# Altium PCB Плата_V_№2.PcbDoc
Units mm, origin at the board's own origin, x right, y up, seen from the top; angles counter-clockwise.
Board outline 70 x 20 mm, 2 copper layers (Top Layer, Bottom Layer); 14 components, 24 nets, 101 pads, 8 vias.
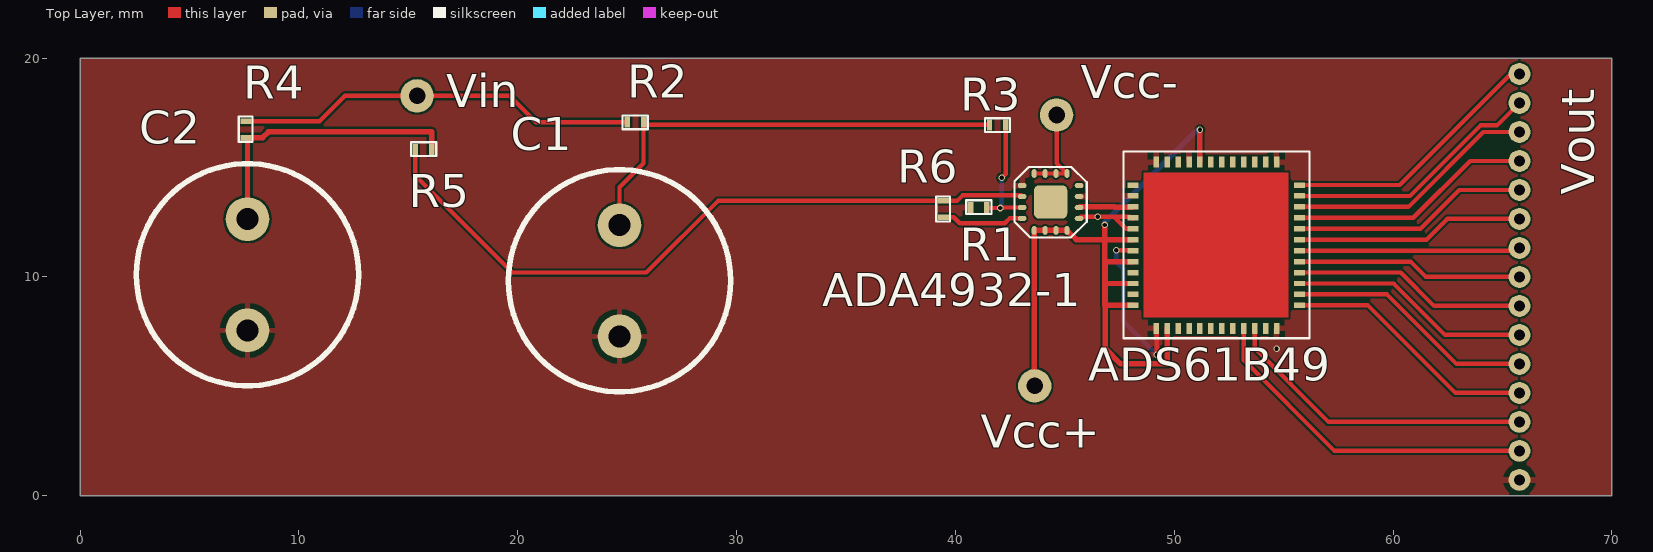
[diagram p0: Top Layer view]
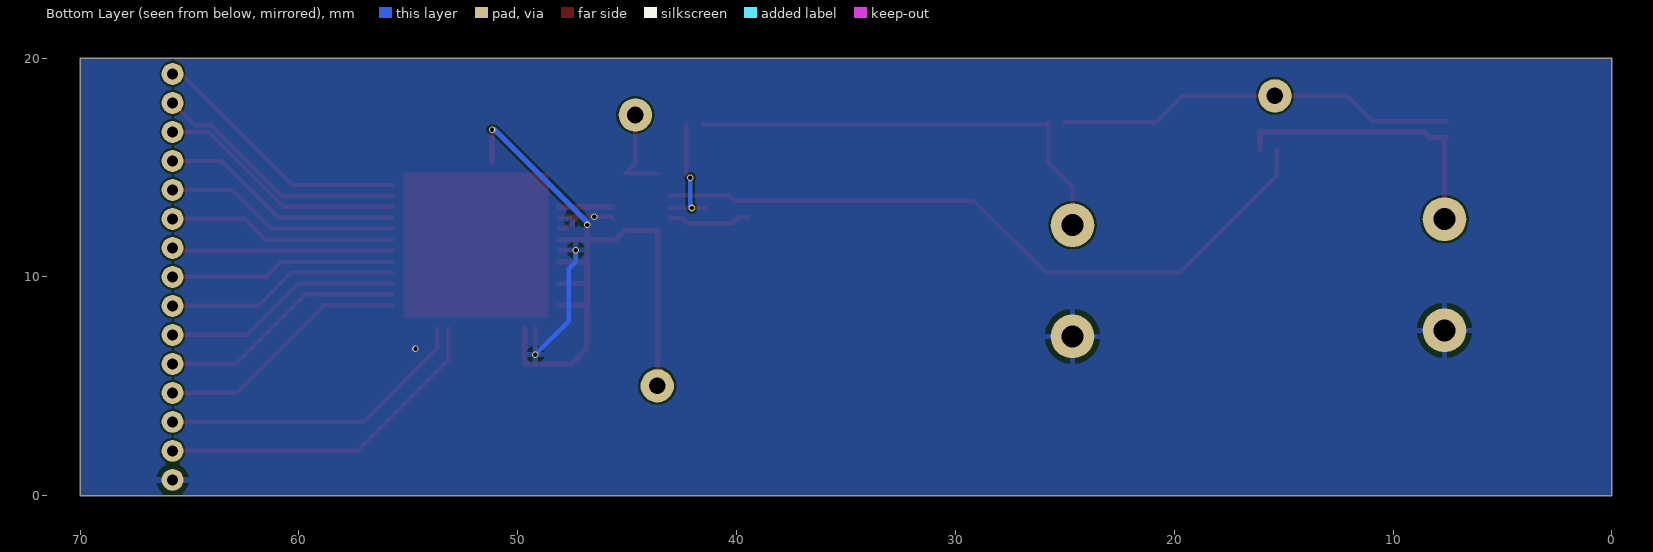
[diagram p1: Bottom Layer view, seen from below]
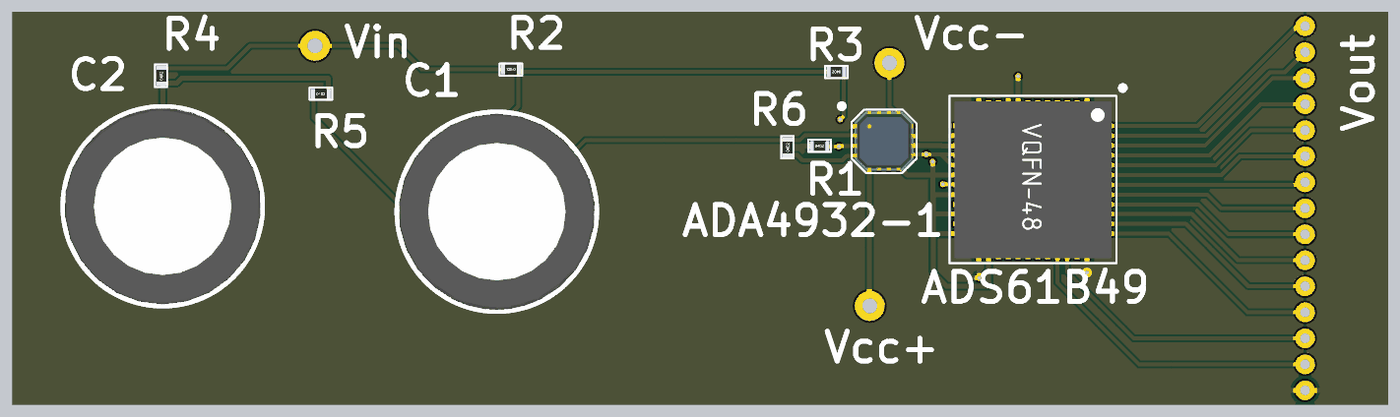
[diagram p2: 3D render of the assembled board from above, using the file's embedded part models]

## Layer stack, top to bottom
Top Solder: solder mask 0.0102, Solder Resist, Dk 3.5
Top Layer: signal copper 0.0356
Dielectric 1: dielectric 0.32, FR-4, Dk 4.8
Bottom Layer: signal copper 0.0356
Bottom Solder: solder mask 0.0102, Solder Resist, Dk 3.5

## Board outline
0,0 0,20 70,20 70,0

## Design rules (kind name [scope] priority, off if disabled: settings)
Clearance Clearance_1 [All] p1: gap=0.1 ignorepadtopadclearanceinfootprint=TRUE
Clearance [All] p2: gap=0.01 ignorepadtopadclearanceinfootprint=TRUE
PolygonConnect [All] p1: connectstyle=Relief reliefconductorwidth=0.254 reliefentries=4 polygonreliefangle="90 Angle" airgapwidth=0.254
RoutingVias [All] p1: holewidth=0.711 width=1.27 viastyle="Through Hole" minholewidth=0.711 minwidth=1.27 maxholewidth=0.711 maxwidth=1.27
ShortCircuit [All] p1: allowed=TRUE
SolderMaskExpansion [All] p1: expansion=0.102
UnRoutedNet [All] p1: checkbadconnections=TRUE
Width [All] p1: maxlimit=0.5 minlimit=0.1 preferedwidth=0.2
28 further rules are at their usual default settings.

## Components (designator, comment, footprint, x,y, rotation, side; value= is the part's Value field where it differs from the comment)
ADA4932-1 "ADA4932-1" CP-16-2 44.35,13.425 r180 top
ADS61B49 "ADS61B49" VQFN-48 51.925,11.45 r270 top
C1 "1uF" Capasitor10X23 24.65,9.825 r0 top
C2 "1uF" Capasitor10X23 7.65,10.1 r180 top
R1 "100kOhm" "SMD 0402" 41.096,13.176 r0 top
R2 "1Ohm" "SMD 0402" 25.343,17.074 r180 top
R3 "100kOhm" "SMD 0402" 41.9,16.95 r180 top
R4 "16Ohm" "SMD 0402" 7.575,16.775 r90 top
R5 "100kOhm" "SMD 0402" 15.725,15.825 r0 top
R6 "100kOhm" "SMD 0402" 39.448,13.13 r90 top
Vcc+ "Vcc+" Вход 43.625,5.025 r90 top
Vcc- "Vcc-" Вход 44.625,17.4 r90 top
Vin "Вход" Вход 15.4,18.275 r90 top
Vout "Выход" Выход 65.775,0.725 r180 top (schematic designator *)

## Footprints (in the part's own frame and the unit in brackets; to place one, negate y for a bottom-side part, rotate by r counter-clockwise, add the part's x,y. Pads: shape width x height; smd on the part's side, far side on the other; paste and mask are expansions set on the pad)
Capasitor10X23 [mm]
  round 2 hole 1: 1(0,-2.54) 2(0,2.54)
  silkscreen extent -5.08,-5.08 5.08,5.08, body extent -5,-5 5,5, height 23
CP-16-2 [mm]
  rrect100% 0.4x0.23 smd: 1(1.3,-0.75) 2(1.3,-0.25) 3(1.3,0.25) 4(1.3,0.75) 9(-1.3,0.75) 10(-1.3,0.25) 11(-1.3,-0.25) 12(-1.3,-0.75)
  rrect100% 0.23x0.4 smd: 5(0.75,1.3) 6(0.25,1.3) 7(-0.25,1.3) 8(-0.75,1.3) 13(-0.75,-1.3) 14(-0.25,-1.3) 15(0.25,-1.3) 16(0.75,-1.3)
  rrect30% 1.524x1.524 smd: 17(0,0)
  round 0.5 on Top Overlay: 34(2.15,-1.775)
  silkscreen extent -1.65,-1.6 1.65,1.63, body extent -1.52,-1.52 1.52,1.52, height 0.9
"SMD 0402" [mm]
  rect 0.25x0.5 smd: 1(0.343,-0.001) 2(-0.405,-0.002)
  silkscreen extent -0.6,-0.3 0.55,0.33, body extent -0.53,-0.25 0.47,0.25, height 0.35
VQFN-48 [mm]
  rect 0.5x0.25 smd: 1(-3.8,2.75) 2(-3.8,2.25) 3(-3.8,1.75) 4(-3.8,1.25) 5(-3.8,0.75) 6(-3.8,0.25) 7(-3.8,-0.25) 8(-3.8,-0.75) 9(-3.8,-1.25) 10(-3.8,-1.75) 11(-3.8,-2.25) 12(-3.8,-2.75) 25(3.8,-2.75) 26(3.8,-2.25) 27(3.8,-1.75) 28(3.8,-1.25) 29(3.8,-0.75) 30(3.8,-0.25) 31(3.8,0.25) 32(3.8,0.75) 33(3.8,1.25) 34(3.8,1.75) 35(3.8,2.25) 36(3.8,2.75)
  rect 0.25x0.5 smd: 13(-2.75,-3.8) 14(-2.25,-3.8) 15(-1.75,-3.8) 16(-1.25,-3.8) 17(-0.75,-3.8) 18(-0.25,-3.8) 19(0.25,-3.8) 20(0.75,-3.8) 21(1.25,-3.8) 22(1.75,-3.8) 23(2.25,-3.8) 24(2.75,-3.8) 37(2.75,3.8) 38(2.25,3.8) 39(1.75,3.8) 40(1.25,3.8) 41(0.75,3.8) 42(0.25,3.8) 43(-0.25,3.8) 44(-0.75,3.8) 45(-1.25,3.8) 46(-1.75,3.8) 47(-2.25,3.8) 48(-2.75,3.8)
  round 0.5 on Top Overlay: 32(-4.675,4.575)
  Top Layer region: -3.325,-3.325 3.3,-3.325 3.3,3.3 -3.325,3.3
  silkscreen extent -4.28,-4.25 4.25,4.25, body extent -4.05,-4.05 4.05,4.05, height 0.8
Вход [mil]
  round 60 hole 30: 1(0,0)
Выход [mm]
  round 1 hole 0.5: 1(0,0) 2(0,-1.325) 3(0,-2.65) 4(0,-3.975) 5(0,-5.3) 6(0,-6.625) 7(0,-7.95) 8(0,-9.275) 9(0,-10.6) 10(0,-11.925) 11(0,-13.25) 12(0,-14.575) 13(0,-15.9) 14(0,-17.225) 15(0,-18.55)

## Part data
C1 C2: library part Capasitor
R1 R2 R3 R4 R5 R6: library part Resistor
Vcc+ Vcc-: library part Вход

## Via types
v1: diameter 0.3, hole 0.2, Top Layer to Bottom Layer, 8 vias

## Nets (pads, with @x,y where several pads share a name; then routed paths per layer and width w, separated by ;. In a path a pad name is that pad's centre, name@x,y a point inside that pad or via, vN(x,y) a via of type N, cw(c..) or ccw(c..) an arc to the next point about the centre after c; other vN are vias at no path point)
GND: ADA4932-1.1 ADA4932-1.9 ADA4932-1.11 ADS61B49.1 ADS61B49.9 ADS61B49.12 ADS61B49.14 ADS61B49.16 ADS61B49.17 ADS61B49.19 ADS61B49.25 ADS61B49.36 C1.1 C2.2 R1.2 Vout.1 | length 11.2
  Top Layer w0.2: ADA4932-1.9 45.725,12.75 v1(46.5,12.75) 47.245,12.75 ; v1(47.35,11.225) 48.1,11.225 ADS61B49.19 ; ADS61B49.17 47.795,12.2 47.245,12.75 ; ADS61B49.16 48.075,12.65 47.975,12.75 47.245,12.75 ; ADS61B49.25 49.2,7.625 v1(49.2,6.45)
  Bottom Layer w0.2: v1(47.35,11.225) 47.35,10.695 47.675,10.37 47.675,7.975 v1(49.2,6.45)
  other v1: 54.675,6.725
Net*_2: ADS61B49.33 Vout.2 | length 15.8
  Top Layer w0.2: ADS61B49.33 53.175,6.2 57.325,2.05 Vout.2
Net*_3: ADS61B49.34 Vout.3 | length 14.4
  Top Layer w0.2: ADS61B49.34 53.675,6.75 57.05,3.375 Vout.3
Net*_4: ADS61B49.37 Vout.4 | length 11.7
  Top Layer w0.2: ADS61B49.37 58.85,8.7 62.85,4.7 Vout.4
Net*_5: ADS61B49.38 Vout.5 | length 11.4
  Top Layer w0.2: ADS61B49.38 59.725,9.2 62.9,6.025 Vout.5
Net*_6: ADS61B49.39 Vout.6 | length 11
  Top Layer w0.2: ADS61B49.39 60.025,9.7 62.375,7.35 Vout.6
Net*_7: ADS61B49.40 Vout.7 | length 10.7
  Top Layer w0.2: ADS61B49.40 60.35,10.2 61.875,8.675 Vout.7
Net*_8: ADS61B49.41 Vout.8 | length 10.3
  Top Layer w0.2: ADS61B49.41 60.8,10.7 61.5,10 Vout.8
Net*_9: ADS61B49.42 Vout.9 | length 10.1
  Top Layer w0.2: ADS61B49.42 65.65,11.2 Vout.9
Net*_10: ADS61B49.43 Vout.10 | length 10.4
  Top Layer w0.2: ADS61B49.43 61.525,11.7 62.475,12.65 Vout.10
Net*_11: ADS61B49.44 Vout.11 | length 10.8
  Top Layer w0.2: ADS61B49.44 61.25,12.2 63.025,13.975 Vout.11
Net*_12: ADS61B49.45 Vout.12 | length 11.1
  Top Layer w0.2: ADS61B49.45 60.925,12.7 63.525,15.3 Vout.12
Net*_13: ADS61B49.46 Vout.13 | length 11.5
  Top Layer w0.2: ADS61B49.46 60.7,13.2 64.125,16.625 Vout.13
Net*_14: ADS61B49.47 Vout.14 | length 11.8
  Top Layer w0.2: ADS61B49.47 60.776,13.7 64.001,16.925 64.75,16.925 Vout.14
Net*_15: ADS61B49.48 Vout.15 | length 12.2
  Top Layer w0.2: ADS61B49.48 60.3,14.2 65.375,19.275 Vout.15
NetADA4932-1_2: ADA4932-1.2 R5.2 R6.1 | length 32.2
  Top Layer w0.2: R5.2 15.32,14.63 19.75,10.2 25.875,10.2 29.148,13.473 R6.1 40.073,13.473 40.325,13.725 43,13.725 ADA4932-1.2
NetADA4932-1_3: ADA4932-1.3 R1.1 R3.2 | length 5.5
  Top Layer w0.2: R1.1 41.464,13.15 v1(42.05,13.15) 42.075,13.175 ADA4932-1.3 ; v1(42.125,14.525) 42.305,14.705 R3.2
  Bottom Layer w0.2: v1(42.05,13.15) 42.125,13.225 v1(42.125,14.525)
NetADA4932-1_4: ADA4932-1.4 R6.2 | length 3.8
  Top Layer w0.2: R6.2 39.925,12.725 40.2,12.45 42.25,12.45 42.475,12.675 ADA4932-1.4
NetADA4932-1_10: ADA4932-1.10 ADS61B49.15 | length 2.5
  Top Layer w0.25: ADA4932-1.10 45.675,13.2 47.255,13.2 47.28,13.175 48.075,13.175 48.1,13.2 ADS61B49.15
NetC1_2: C1.2 R2.2 R3.1 | length 21
  Top Layer w0.2: C1.2 24.65,14.1 25.748,15.198 R2.2 25.873,16.951 R3.1
NetC2_1: C2.1 R4.2 R5.1 | length 13.2
  Top Layer w0.25: C2.1 7.65,16.297 R4.2 8.345,16.37 8.607,16.632 16.068,16.632 R5.1
NetR2_1: R2.1 R4.1 Vin.1 | length 18.4
  Top Layer w0.2: R4.1 10.943,17.118 12.1,18.275 Vin.1 19.625,18.275 20.825,17.075 R2.1
VCC+: ADA4932-1.5 ADA4932-1.6 ADA4932-1.7 ADA4932-1.8 ADS61B49.8 ADS61B49.18 ADS61B49.20 ADS61B49.22 ADS61B49.24 ADS61B49.26 Vcc+.1 | length 35.8
  Top Layer w0.25: Vcc+.1 43.6,5.05 ADA4932-1.5 ADA4932-1.6 ADA4932-1.7 ADA4932-1.8 45.525,11.7 46.825,11.7 ; v1(46.825,12.375) 46.825,11.7 ; ADS61B49.24 46.85,8.7 ; ADS61B49.22 46.85,9.7 ; ADS61B49.20 46.85,10.7 46.85,9.7 ; ADS61B49.18 46.825,11.7 ; ADS61B49.26 49.675,6.025 47.55,6.025 46.85,6.725 46.85,8.7 ; ADS61B49.8 v1(51.175,16.725) ; 46.825,11.7 46.825,8.7 46.85,8.7 ; 46.85,8.7 46.85,9.7
  Bottom Layer w0.25: v1(46.825,12.375) 46.825,12.505 51.045,16.725 v1(51.175,16.725)
VCC-: ADA4932-1.13 ADA4932-1.14 ADA4932-1.15 ADA4932-1.16 Vcc-.1 | length 4.4
  Top Layer w0.2: ADA4932-1.16 ADA4932-1.15 ADA4932-1.14 ADA4932-1.13 44.625,15.2 Vcc-.1
pads on no net: ADA4932-1.12 ADA4932-1.17 ADA4932-1.34 ADS61B49.2 ADS61B49.3 ADS61B49.4 ADS61B49.5 ADS61B49.6 ADS61B49.7 ADS61B49.10 ADS61B49.11 ADS61B49.13 ADS61B49.21 ADS61B49.23 ADS61B49.27 ADS61B49.28 ADS61B49.29 ADS61B49.30 ADS61B49.31 ADS61B49.32 ADS61B49.35

## Polygon pours and split planes (outlines as drawn)
GND on Top Layer "Top Layer GND" (solid, pour order 0): 70,20 0,20 0,0 70,0
GND on Bottom Layer "Top Layer GND" (solid, pour order 2): 70,20 0,20 0,0 70,0